# Altium PCB Motor-20.PcbDoc
Units mm, origin at the board's own origin, x right, y up, seen from the top; angles counter-clockwise.
Board outline 40 x 20 mm, 4 copper layers (Top Layer, Layer 1, Layer 2, Bottom Layer), stack 0.603 mm thick; 49 components, 41 nets, 207 pads, 85 vias.
Unrouted connection lines stored in the file: 20.
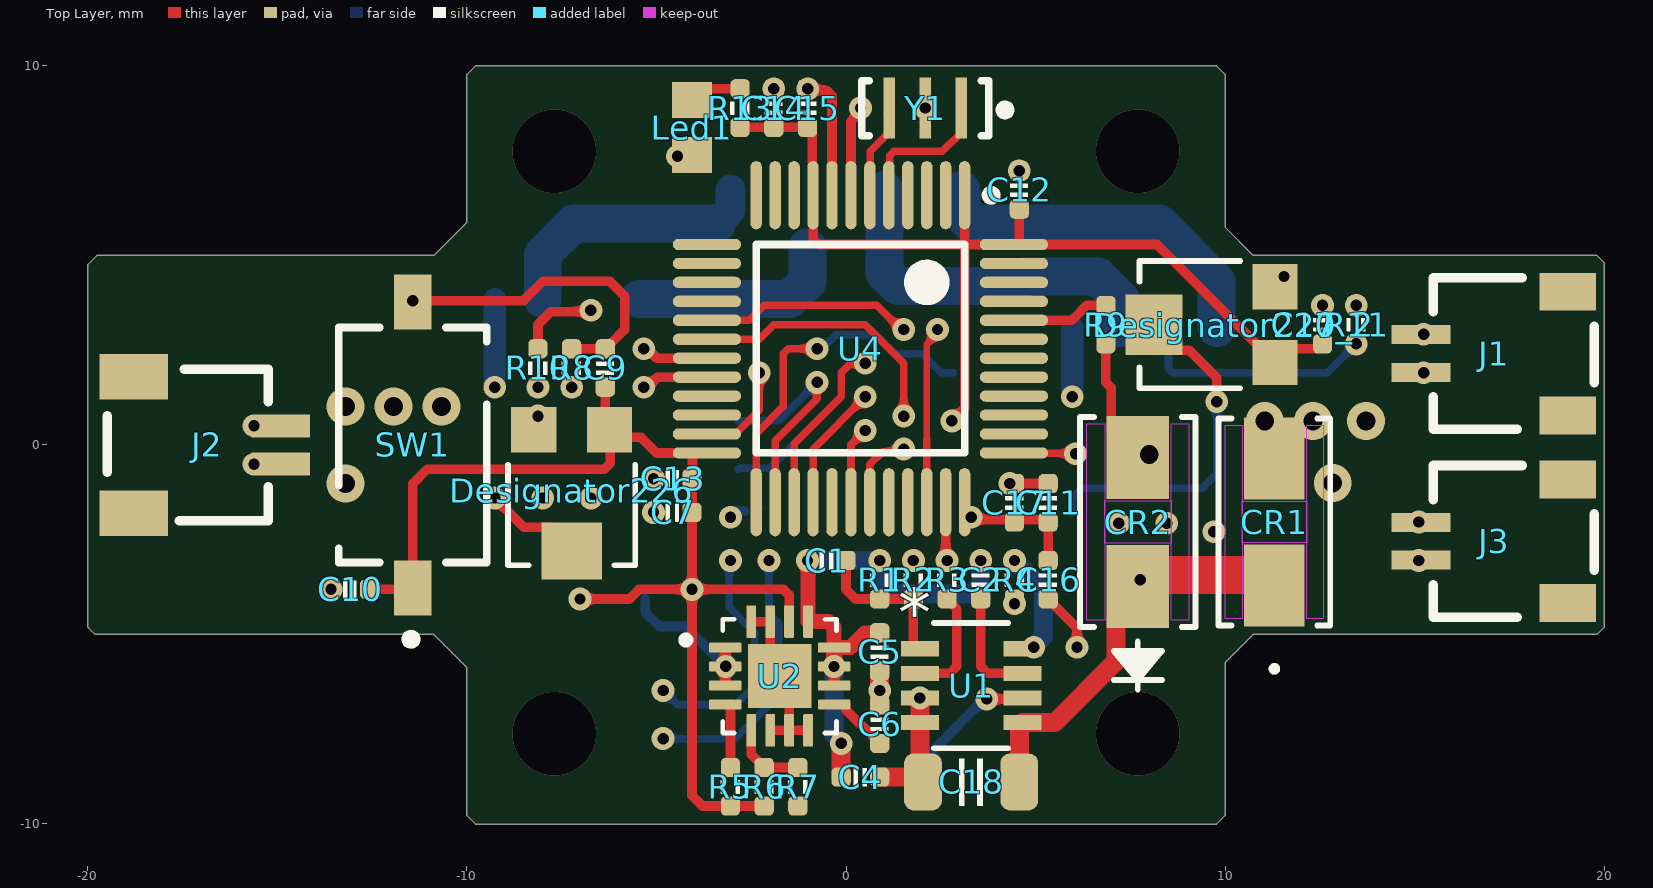
[diagram p0: Top Layer view]
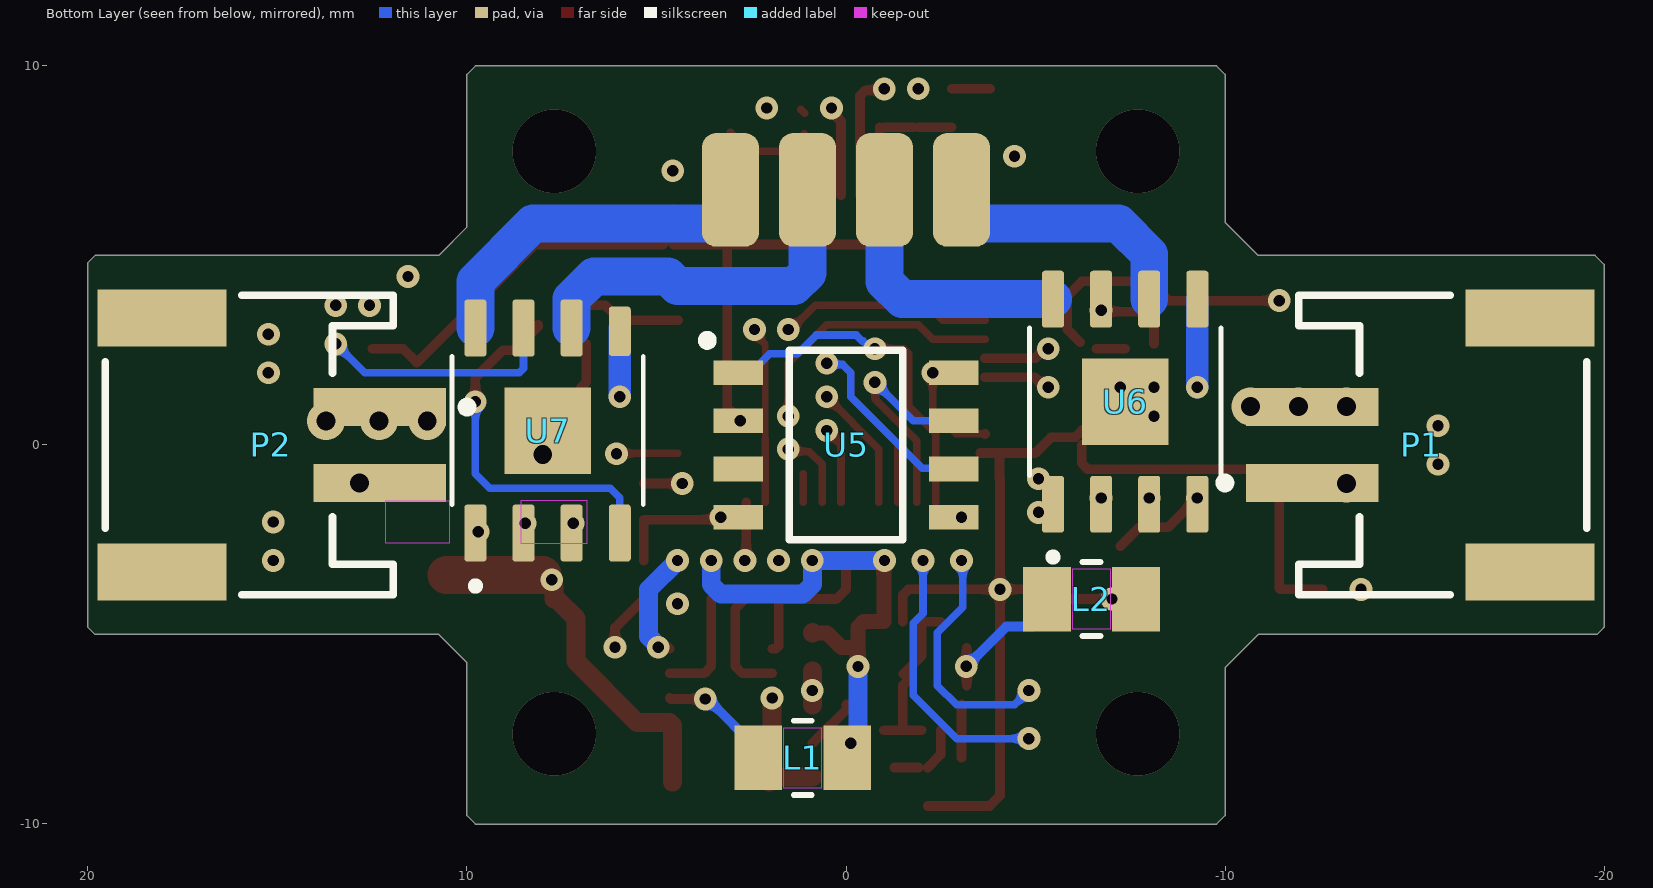
[diagram p1: Bottom Layer view, seen from below]
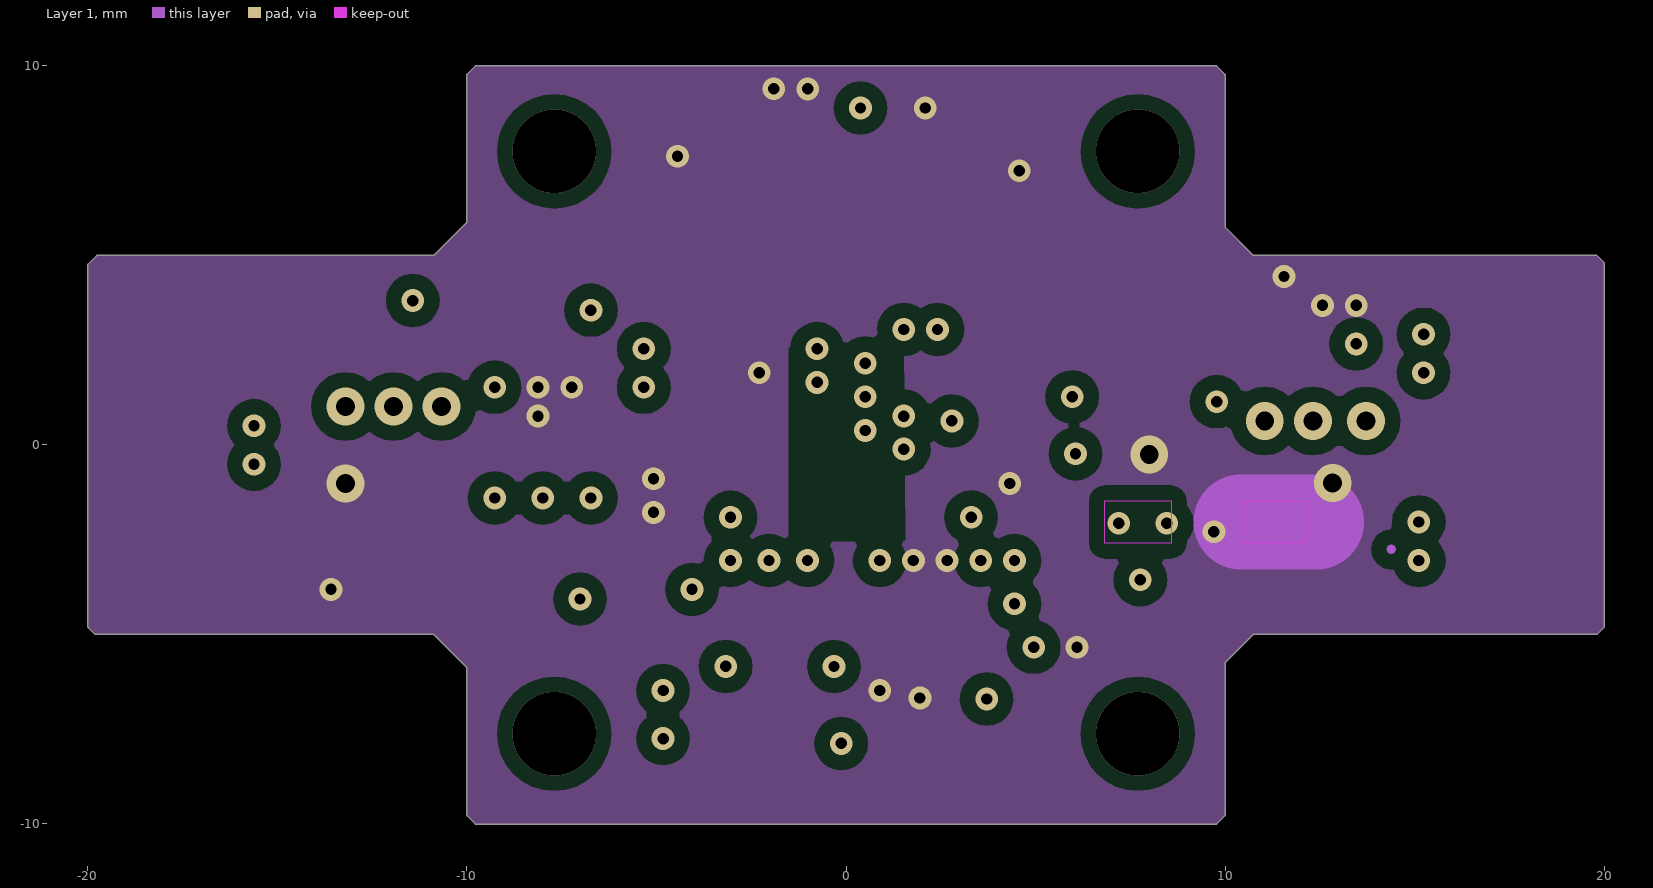
[diagram p2: Layer 1]
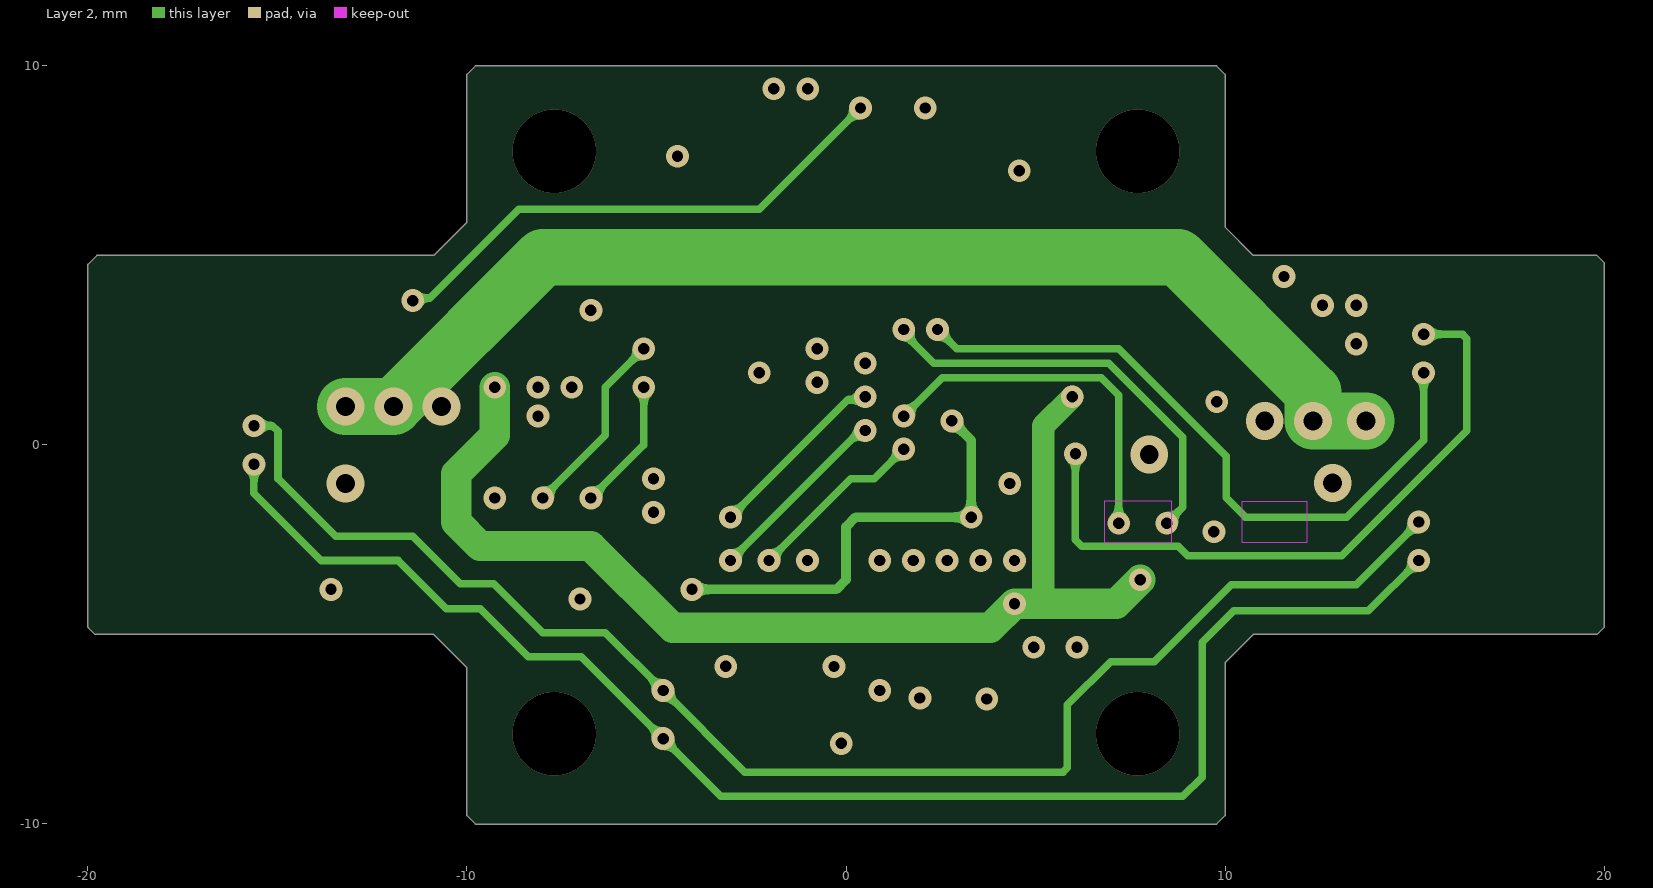
[diagram p3: Layer 2]
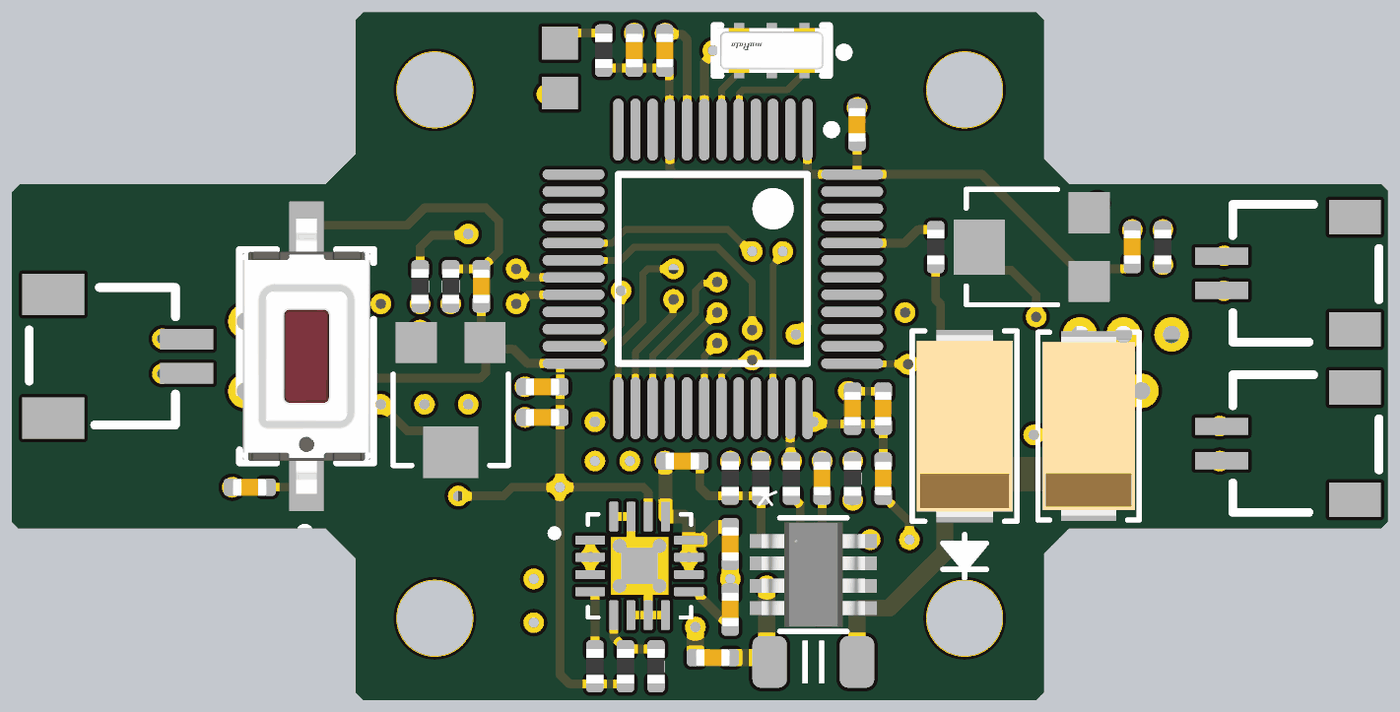
[diagram p4: 3D render of the assembled board from above, using the file's embedded part models]
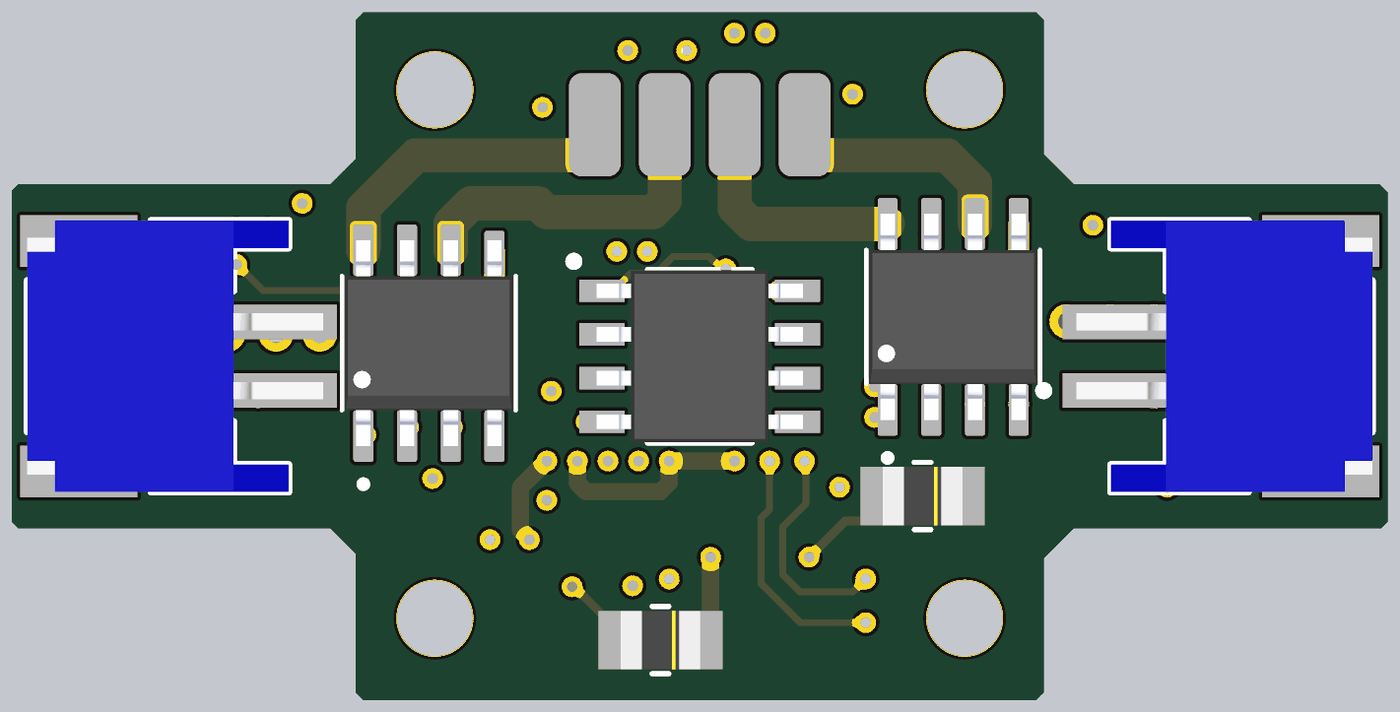
[diagram p5: 3D render of the assembled board from below, using the file's embedded part models]

## Layer stack, top to bottom
Top Solder: solder mask 0.0102, Solder Resist, Dk 3.5
Top Layer: signal copper 0.0356
Dielectric 2: prepreg 0.0711, PP-006, Dk 4.1
Layer 1: signal copper 0.035
Dielectric 1: dielectric 0.32, FR-4, Dk 4.8
Layer 2: signal copper 0.035
Dielectric 3: prepreg 0.0711, PP-006, Dk 4.1
Bottom Layer: signal copper 0.0356
Bottom Solder: solder mask 0.0102, Solder Resist, Dk 3.5

## Board outline
-19.812,-5 -19.986,-4.826 -20,-4.812 -20,4.765 -19.765,5 -10.875,5 -10,5.875 -10,9.779 -9.779,10 9.779,10 10,9.779 10,5.748 10.748,5 19.812,5 20,4.812 20,-4.812 19.812,-5 10.748,-5 10,-5.748 10,-9.779 9.779,-10 -9.779,-10 -10,-9.779 -10,-5.875 -10.875,-5

## Design rules (kind name [scope] priority, off if disabled: settings)
Clearance [All] p1: gap=0 ignorepadtopadclearanceinfootprint=FALSE
PlaneConnect [All] p1: planeconnectstyle=Direct reliefexpansion=0.508 reliefentries=4 reliefconductorwidth=0.254 reliefairgap=0.254
PolygonConnect [All] p1: connectstyle=Direct reliefconductorwidth=0.254 reliefentries=4 polygonreliefangle="90 Angle" airgapwidth=0.254
RoutingVias [All] p1: holewidth=0.711 width=1.27 viastyle="Through Hole" minholewidth=0.1 minwidth=0.1 maxholewidth=5 maxwidth=5
SolderMaskExpansion [All] p1: expansion=0.102 istentingtop=FALSE
Width [All] p1: maxlimit=3 minlimit=0.15 preferedwidth=0.254
29 further rules are at their usual default settings.

## Classes and differential pairs
component class Motor-20: CR1 CR2 J1 J2 J3 L1 L2 P1 P2 SW1 U2 U4 U5 U6 U7 Y1

## Components (designator, comment, footprint, x,y, rotation, side; value= is the part's Value field where it differs from the comment)
C1 "10uF" CAP_0402 -0.508,-3.048 r180 top value=0.1u
C2 "10uF" CAP_0402 3.556,-3.556 r90 top value=0.1u
C4 "10uF" CAP_0402 0.381,-8.763 r180 top value=0.1u
C5 "10uF" CAP_0402 0.889,-5.461 r90 top value=0.1u
C6 "10uF" CAP_0402 0.889,-7.366 r270 top value=0.1u
C7 "10uF" CAP_0402 -4.572,-1.778 r0 top value=0.1u
C9 "10uF" CAP_0402 -6.35,2.032 r90 top value=0.1u
C10 "10uF" CAP_0402 -13.081,-3.81 r0 top value=0.1u
C10_2 "10uF" CAP_0402 12.573,3.175 r270 top value=0.1u
C11 "10uF" CAP_0402 5.334,-1.524 r270 top value=0.1u
C12 "10uF" CAP_0402 4.572,6.731 r270 top value=0.1u
C13 "10uF" CAP_0402 -4.572,-0.889 r0 top value=0.1u
C14 "10uF" CAP_0402 -1.905,8.89 r270 top value=0.1u
C15 "10uF" CAP_0402 -1.016,8.89 r270 top value=0.1u
C16 "10uF" CAP_0402 5.334,-3.556 r90 top value=0.1u
C17 "10uF" CAP_0402 4.445,-1.524 r270 top value=0.1u
C18 "100uF" 1206-CAP 3.302,-8.89 r0 top value=0.1u (schematic designator C10)
CR1 "SS54-HF" SDO_DO-214AC_CIP 11.303,-2.032 r90 top
CR2 "SMAJ30CA" SMASeries_LTF 7.7,-2.032 r90 top
Designator226 "Comment" EVM-3ESX50B14_PAN -7.239,-1.143 r180 top
Designator227 "Comment" EVM-3ESX50B14_PAN 9.779,3.175 r90 top
J1 "" SM02B-SRSS-TB(LF)(SN)#1 17.145,2.413 r90 top
J2 "" SM02B-SRSS-TB(LF)(SN)#2 -16.891,0 r270 top
J3 "" SM02B-SRSS-TB(LF)(SN)#1 17.145,-2.54 r90 top
L1 "2.2uH" IND_EPCOS_B82498F_EPC#1 1.143,-8.255 r0 bottom
L2 "2.2uH" IND_EPCOS_B82498F_EPC#2 -6.477,-4.064 r0 bottom
Led1 "22uF" CAPC1608X90X35ML10T15 -4.064,8.382 r90 top (schematic designator C6)
P1 "" "JST- S2B-PH-SM4-TB(LF)(SN)-2_V" -15.748,0 r90 bottom
P2 "" "JST- S2B-PH-SM4-TB(LF)(SN)-2_V" 15.748,0 r270 bottom
R1 "0R" RES_0402 0.889,-3.556 r270 top value=22R (schematic designator R10)
R2 "0R" RES_0402 1.778,-3.556 r90 top value=22R (schematic designator R10)
R3 "0R" RES_0402 2.667,-3.556 r90 top value=22R (schematic designator R10)
R4 "0R" RES_0402 4.445,-3.556 r270 top value=22R (schematic designator R10)
R5 "0R" RES_0402 -3.048,-9.017 r270 top value=22R (schematic designator R10)
R6 "0R" RES_0402 -2.159,-9.017 r270 top value=22R (schematic designator R10)
R7 "0R" RES_0402 -1.27,-9.017 r270 top value=22R (schematic designator R10)
R8 "0R" RES_0402 -7.239,2.032 r90 top value=22R (schematic designator R10)
R9 "0R" RES_0402 6.858,3.175 r90 top value=22R (schematic designator R10)
R10 "0R" RES_0402 -8.128,2.032 r90 top value=22R
R11 "0R" RES_0402 13.462,3.175 r90 top value=22R (schematic designator R10)
R13 "0R" RES_0402 -2.794,8.89 r90 top value=22R (schematic designator R10)
SW1 "" FP-PTS636_SKG25_SMTR_LFS-MFG -11.43,0 r90 top
U1 "SY8303AIC" TSOT_303AIC_SGY 3.302,-6.35 r0 top
U2 "TLV62130RGTR" QFN50P300X300X100-17N -1.75,-6.096 r0 top
U4 "STM32F101CBT6" LQFP48_N 0.381,2.54 r270 top
U5 "MT6816" SOIC127P600X175-8N-8-V 0,0 r180 bottom
U6 "TB67H450FNG,EL" SOIC127P599X175-9N#1 -7.366,1.143 r90 bottom
U7 "TB67H450FNG,EL" SOIC127P599X175-9N#2 7.874,0.381 r90 bottom
Y1 "" FP-CSTCE_V-MFG 2.093,8.89 r180 top

## Footprints (in the part's own frame and the unit in brackets; to place one, negate y for a bottom-side part, rotate by r counter-clockwise, add the part's x,y. Pads: shape width x height; smd on the part's side, far side on the other; paste and mask are expansions set on the pad)
1206-CAP [mm]
  rrect50% 1x1.5 smd: 1(-1.27,0) 2(1.27,0)
  silkscreen extent -0.3,-0.61 0.3,0.61, body extent -1.5,-0.75 1.5,0.75, height 1.5
CAP_0402 [mil]
  rrect50% 20x20 smd: 1(-20,0) 2(20,0)
  silkscreen extent -7,-9 7,9, body extent -20,-10 20,10, height 20
CAPC1608X90X35ML10T15 [mm] "Chip Capacitor, 2-Leads, Body 1.60x0.80mm, IPC Low Density"
  rect 0.95x1.05 smd: 1(-0.725,0) 2(0.725,0)
  body extent -0.85,-0.45 0.85,0.45, height 0.9
EVM-3ESX50B14_PAN [mil]
  rect 47x47 smd paste+0 mask+0: 1(-39.37,-60.75) 3(39.38,-60.75)
  rect 62.99x59.06 smd paste+0 mask+0: 2(0,65)
  silkscreen extent -66,-25 66,80
FP-CSTCE_V-MFG [mm]
  rect 0.3x1.6 smd paste+0 mask+0: 1(-0.95,0) 2(0,0) 3(0.95,0)
  silkscreen extent -2.23,-0.72 1.68,0.72, body extent -1.78,-0.9 1.78,0.9, height 0.25
FP-PTS636_SKG25_SMTR_LFS-MFG [mm]
  rect 1.45x1 smd paste+0 mask+0: 1(-3.775,0) 2(3.775,0)
  silkscreen extent -5.25,-1.95 3.1,1.95, body extent -4.6,-2.05 4.6,2.05, height 0.25
IND_EPCOS_B82498F_EPC#1 [mil]
  rect 49.5x67 smd paste+0 mask+0: 1(-46.25,0) 2(46.25,0)
  Top Layer keep-out region: -19.5,-31.5 -19.5,31.5 19.5,31.5 19.5,-31.5
  silkscreen extent -9,-38 9,38, body extent -46,-34 46,34, height 55
IND_EPCOS_B82498F_EPC#2 [mil]
  rect 49.49x67 smd paste+0 mask+0: 1(-46.26,0) 2(46.26,0)
  Top Layer keep-out region: -19.5,-31.5 -19.5,31.5 19.5,31.5 19.5,-31.5
  silkscreen extent -9,-38 9,38, body extent -46,-34 46,34, height 55
"JST- S2B-PH-SM4-TB(LF)(SN)-2_V" [mm] "SMD, 2-Leads, Body 7.9x7.6mm, Pitch 2mm"
  rect 1x3.5 smd: 1(-1,3.45) 2(1,3.45)
  rect 1.5x3.4 smd: MP1(-3.35,-2.3) MP2(3.35,-2.3)
  silkscreen extent -3.95,-3.8 3.95,5.88, body extent -3.95,-3.8 3.95,4.8, height 5.6
LQFP48_N [mm] "Thin QFP, 48-Leads, Body 7x7mm, Pitch 0.5mm, IPC Medium Density"
  oval 1.8x0.3 smd: 1(-4.05,2.75) 2(-4.05,2.25) 3(-4.05,1.75) 4(-4.05,1.25) 5(-4.05,0.75) 6(-4.05,0.25) 7(-4.05,-0.25) 8(-4.05,-0.75) 9(-4.05,-1.25) 10(-4.05,-1.75) 11(-4.05,-2.25) 12(-4.05,-2.75) 25(4.05,-2.75) 26(4.05,-2.25) 27(4.05,-1.75) 28(4.05,-1.25) 29(4.05,-0.75) 30(4.05,-0.25) 31(4.05,0.25) 32(4.05,0.75) 33(4.05,1.25) 34(4.05,1.75) 35(4.05,2.25) 36(4.05,2.75)
  oval 0.3x1.8 smd: 13(-2.75,-4.05) 14(-2.25,-4.05) 15(-1.75,-4.05) 16(-1.25,-4.05) 17(-0.75,-4.05) 18(-0.25,-4.05) 19(0.25,-4.05) 20(0.75,-4.05) 21(1.25,-4.05) 22(1.75,-4.05) 23(2.25,-4.05) 24(2.75,-4.05) 37(2.75,4.05) 38(2.25,4.05) 39(1.75,4.05) 40(1.25,4.05) 41(0.75,4.05) 42(0.25,4.05) 43(-0.25,4.05) 44(-0.75,4.05) 45(-1.25,4.05) 46(-1.75,4.05) 47(-2.25,4.05) 48(-2.75,4.05)
  silkscreen extent -4.17,-2.75 2.75,3.58, body extent -3.5,-3.5 3.5,3.5, height 1.6
QFN50P300X300X100-17N [mm]
  rrect25% 0.86x0.26 smd: 1(-1.435,0.75) 2(-1.435,0.25) 3(-1.435,-0.25) 4(-1.435,-0.75) 9(1.435,-0.75) 10(1.435,-0.25) 11(1.435,0.25) 12(1.435,0.75)
  rrect25% 0.26x0.86 smd: 5(-0.75,-1.435) 6(-0.25,-1.435) 7(0.25,-1.435) 8(0.75,-1.435) 13(0.75,1.435) 14(0.25,1.435) 15(-0.25,1.435) 16(-0.75,1.435)
  rect 1.68x1.68 smd paste-2: 17(0,0)
  round 0.4 smd mask+0: 18(0,0) 19(-0.58,0.58) 20(0.58,0.58) 21(-0.58,-0.58) 22(0.58,-0.58)
  silkscreen extent -2.57,-1.5 1.5,1.5
RES_0402 [mil]
  rrect50% 20x20 smd: 1(-20,0) 2(20,0)
  silkscreen extent -7,-10 7,10, body extent -20,-10 20,10, height 14
SDO_DO-214AC_CIP [mil]
  rect 85x63 smd paste+0 mask+0: 1(-66,0) 2(66,0)
  Top Layer keep-out region: -100.5,-51 -100.5,-33.5 100.5,-33.5 100.5,-51
  Top Layer keep-out region: -100.5,33.5 -100.5,51 100.5,51 100.5,33.5
  Top Layer keep-out region: -21.5,-33.5 -21.5,33.5 21.5,33.5 21.5,-33.5
  Keep-Out Layer region: -21.5,-33.5 -21.5,33.5 21.5,33.5 21.5,-33.5
  silkscreen extent -155,-58 108,58, body extent -103,-53 103,53, height 89
SM02B-SRSS-TB(LF)(SN)#1 [mm]
  rect 0.5x1.55 smd: 1(-0.5,1.975) 2(0.5,1.975)
  rect 1x1.5 smd: 3(-1.63,-1.9) 4(1.63,-1.9)
  silkscreen extent -2,-2.6 2,1.65
SM02B-SRSS-TB(LF)(SN)#2 [mm]
  rect 0.6x1.55 smd: 1(-0.5,1.975) 2(0.5,1.975)
  rect 1.2x1.8 smd: 3(-1.8,-1.9) 4(1.8,-1.9)
  silkscreen extent -2,-2.6 2,1.65
SMASeries_LTF [mil]
  rect 86x65 smd paste+0 mask+0: 1(-67,0) 2(67,0)
  Top Layer keep-out region: -102,-53 -102,-34.5 102,-34.5 102,-53
  Top Layer keep-out region: -102,34.5 -102,53 102,53 102,34.5
  Top Layer keep-out region: -22,-34.5 -22,34.5 22,34.5 22,-34.5
  Keep-Out Layer region: -22,-34.5 -22,34.5 22,34.5 22,-34.5
  silkscreen extent -174,-60 109,60, body extent -104,-55 104,55, height 92
SOIC127P599X175-9N#1 [mm]
  rrect25% 1.5x0.58 smd: 1(-2.705,1.905) 2(-2.705,0.635) 3(-2.705,-0.635) 4(-2.705,-1.905) 5(2.705,-1.905) 6(2.705,-0.635) 7(2.705,0.635) 8(2.705,1.905)
  rect 2.285x2.285 smd paste-2: 9(0,0)
  silkscreen extent -4.2,-2.52 1.95,2.52, body extent -3,-2.45 3,2.45, height 1.75
SOIC127P599X175-9N#2 [mm]
  rrect25% 1.5x0.58 smd: 1(-2.705,1.905) 2(-2.705,0.635) 3(-2.705,-0.635) 4(-2.705,-1.905) 6(2.705,-0.635) 7(2.705,0.635) 8(2.705,1.905)
  rrect25% 1.3x0.58 smd: 5(2.619,-1.905)
  rect 2.285x2.285 smd paste-2: 9(0,0)
  silkscreen extent -4.2,-2.52 1.95,2.52, body extent -3,-2.45 3,2.45, height 1.75
SOIC127P600X175-8N-8-V [mm]
  rect 1.31x0.65 smd: 1(-2.845,1.905) 2(-2.845,0.635) 3(-2.845,-0.635) 4(-2.845,-1.905) 5(2.845,-1.905) 6(2.845,-0.635) 7(2.845,0.635) 8(2.845,1.905)
  silkscreen extent -3.79,-2.5 1.5,2.88, body extent -3,-2.5 3,2.5, height 1.75
TSOT_303AIC_SGY [mm]
  rect 1x0.4 smd paste+0 mask+0: 1(-1.353,0.975) 2(-1.353,0.325) 3(-1.353,-0.325) 4(-1.353,-0.975) 5(1.353,-0.975) 6(1.353,-0.325) 7(1.353,0.325) 8(1.353,0.975)
  silkscreen extent -0.98,-1.65 0.98,1.65, body extent -1.5,-1.52 1.5,1.52, height 1.09

## Part data
C1 C2 C4 C5 C6 C7 C9 C10 C10_2 C11 C12 C13 C14 C15 C16 C17: library part µçÈÝ-0402, "Capacitor"
C18: library part µçÈÝ-1206, "Capacitor"
CR1: "No Description Available", Mfr_Name=Comchip, Type="Diodes - Rectifiers, Single"
CR2: "No Description Available", Mfr_Name="Littelfuse Inc"
J1 J2 J3: library part SM02B-SRSS-TB(LF)(SN), "Connector Header Surface Mount, Right Angle 2 position 0.039 _1.00mm_", Package=None, Availability=Unavailable, MF="JST Sales", MP=SM02B-SRSS-TB_LF__SN_, Price=None, SnapEDA_Link=https://www.snapeda.com/parts/SM02B-SRSS-TB%28LF%29%28SN%29/JST%20Sales%20America%20Inc./view-part/447499/?ref=snap
L1 L2: library part B82498F3100+000, "No Description Available", Mfr_Name=TDK
Led1: library part CMP-2006-02924-1, Manufacturer=Murata, PART NUMBER=GRM188R71H472KA01D
P1 P2: library part CMP-1755-00001-1, "Male Header, Pitch 2 mm, 1 x 2 Position, Height 5.5 mm, -25 to 85 degC, RoHS, Tape and Reel", Colour=Black, Current Rating="3 A", Max Operating Temperature=105degC, Min Operating Temperature=-65degC, Package Quantity=100, ComponentLink1Description="Manufacturer URL", ComponentLink1URL=http://www.jst.com/home2.html, ComponentLink2Description=Datasheet, ComponentLink2URL=http://www.jst-mfg.com/product/pdf/eng/ePH.pdf, Contact Finish=Lead, Contact Material=Bronze, Contact Plating=Tin, DatasheetVersion=Dec-12, Height="8.13 mm", Lead Pitch="0.1 inch", Length="101.19 mm", Mount="Through Hole", PackageDescription="Male Header, Pitch 2 mm, 1 x 2 Position, Height 5.5 mm", PackageReference=S2B-PH-SM4-TB(LF)(SN)-2, Packaging=Bulk, Pins=40, Radiation Hardening=No, RoHSCompliant=True, Width="2.34 mm"
R1 R2 R3 R4 R5 R6 R7 R8 R9 R10 R11 R13: library part CMP-2000-00054-1
SW1: library part CMP-10040-000025-1, "TACT 6.0 X 3.5, 2.5 MM H, 250GF,"
U1: "No Description Available", Mfr_Name=Silergy, RefDes=RefDes, Type=Type
U2: "3-17V 3A Step-Down Converter in 3x3 QFN Package 16-VQFN -40 to 85", Package="VQFN-16 Texas Instruments", Availability=Unavailable, DigiKey-Purchase-URL=https://snapeda.com/shop?store=DigiKey&id=423292, MF="Texas Instruments", Mouser-Purchase-URL=https://snapeda.com/shop?store=Mouser&id=423292, MP=TLV62130RGTR, Price=None, SnapEDA_Link=https://www.snapeda.com/parts/TLV62130RGTR/Texas%20Instruments/view-part/423292/?ref=snap, Texas_Instruments-Purchase-URL=https://snapeda.com/shop?store=Texas+Instruments&id=423292
U4: "STM32 ARM-based 32-bit MCU with 128 Kbytes Flash, 48-pin LQFP, Industrial Temperature", ComponentLink1Description="Manufacturer Link", ComponentLink1URL=www.st.com/stm32, ComponentLink2Description=Datasheet, ComponentLink2URL=http://www.st.com/stonline/products/literature/ds/13586.pdf, DatasheetVersion="rev6, Mar-2008", PackageDescription="48-Pin Low-Profile Quad Flat Pack, 7 x 7 mm Body, 0.5 mm Pitch (LQFP48)", PackageReference=LQFP48, PackageVersion=Mar-2008, Published=30-May-2008, Publisher="Altium Limited"
U5: library part TLE5012B_E1000, "TLE5012B/TLI5012B Angular and Linear Position Sensor Evaluation Board Automotive", Package="SOIC-8 Infineon Technologies", Availability="In Stock", Check_prices=https://www.snapeda.com/parts/TLE5012B%20E1000/Infineon+Technologies/view-part/?ref=eda, MF="Infineon Technologies", MP="TLE5012B E1000", Price=None, SnapEDA_Link=https://www.snapeda.com/parts/TLE5012B%20E1000/Infineon+Technologies/view-part/?ref=snap
U6 U7: "- Motor Driver - - 8-HSOP", Package="SOIC-8 Toshiba Semiconductor and Storage", Availability="In Stock", Check_prices=https://www.snapeda.com/parts/TB67H450FNG,EL/Toshiba+Semiconductor+and+Storage/view-part/?ref=eda, MF="Toshiba Semiconductor and Storage", MP=TB67H450FNG,EL, Price=None, Purchase-URL=https://pricing.snapeda.com/search?q=TB67H450FNG,EL&ref=eda, SnapEDA_Link=https://www.snapeda.com/parts/TB67H450FNG,EL/Toshiba+Semiconductor+and+Storage/view-part/?ref=snap
Y1: library part CMP-06057-000013-1, "CERAMIC RES 20.0000MHZ 15PF SMD", Capacitance=15pF, Case/Package=SMD/SMT, Frequency=20MHz, Frequency Stability=0.3%, Frequency Tolerance=0.5%, Max Operating Temperature=80°C, Min Operating Temperature=-20°C, Package Quantity=3000, Resistor Type=Ceramic, Contact Plating=Gold, Height=0.039inch, Impedance=40R, Lead Free="Lead Free", Length=0.126inch, Load Capacitance=15pF, Mount="Surface Mount", Number of Pins=3, Packaging="Tape and Reel", REACH SVHC="No SVHC", Self Resonant Frequency=20MHz, Termination=SMD/SMT, Tolerance=0.5%, Width=0.051inch

## Free pads (board coordinates)
  rrect50% 1.5x3 smd far side: 5(-3.048,6.731) 5(-1.016,6.731) 5(1.016,6.731) 5(3.048,6.731)

## Via types
v1: diameter 0.6, hole 0.3, Top Layer to Bottom Layer, 72 vias
v2: diameter 1, hole 0.5, Top Layer to Bottom Layer, 9 vias
v3: diameter 2.2, hole 2.2, Top Layer to Bottom Layer, 4 vias

## Nets (pads, with @x,y where several pads share a name; then routed paths per layer and width w, separated by ;. In a path a pad name is that pad's centre, name@x,y a point inside that pad or via, vN(x,y) a via of type N, cw(c..) or ccw(c..) an arc to the next point about the centre after c; other vN are vias at no path point)
BOOT0: R9.2 U4.44 | length 2.6
  Top Layer w0.254: U4.44 5.957,3.29 6.35,3.683 R9.2
CANH:  | length 0
CANL: 
CSN: U4.25 U5.1 | length 9.3
  Top Layer w0.2: U4.25 -2.369,0.298 -1.651,1.016 -1.651,2.413 -1.524,2.54 v1(-0.762,2.54)
  Bottom Layer w0.2: v1(-0.762,2.54) -0.654,2.54 -0.45,2.744 -0.431,2.744 -0.273,2.902 0.781,2.902 1.27,2.413 2.007,2.413 2.515,1.905 U5.1
GND: C4.1 C5.1 C6.1 C7.1 C10.1 C10_2.1 C11.1 C12.1 C13.1 C14.1 C15.1 C16.1 C17.1 C18.1 CR2.2 Designator226.3 Designator227.3 Led1.1 P1.1 P1.MP1 P1.MP2 P2.2 P2.MP1 P2.MP2 R2.2 R3.2 R7.2 R8.1 R9.1 R10.1 R11.2 U1.3 U1.4 U2.6 U2.7 U2.8 U2.15 U2.16 U2.17 U2.18 U2.19 U2.20 U2.21 U2.22 U4.8 U4.23 U4.35 U4.47 U5.8 U6.1 U6.9 U7.1 U7.9 Y1.2 | length 24.6
  Top Layer w0.2: U4.23@-3.66,0.299 -2.91,0.299 -2.286,0.923 v1(-2.286,1.905)
  Top Layer w0.254: U4.23 U4.23@-3.66,0.299 ; U2.16 U2.15 -2,-5.559 U2.17@-1.516,-6.043 ; U2.6 U2.7 ; U2.17 -1.5,-6.346 U2.7 ; U2.8 U2.7 ; C15.1@-0.882,9.395 -0.849,9.362 -0.518,9.362 -0.369,9.214 U4.8 ; C18.1@1.905,-8.763 C18.1 ; U4.35 2.631,-3.012 v1(2.667,-3.048) ; v1(4.318,-1.016) C11.1 ; C16.1 6.096,-4.826 v1(6.096,-5.334) ; R9.1 6.858,1.651 7.001,1.508 7.001,0.368 CR2.2 7.776,-0.254 v2(8.001,-0.254)
  Top Layer w0.5: C4.1 C18.1@1.905,-8.763 ; C6.1 v1(0.889,-6.477) C5.1 ; U1.4 1.949,-8.807 C18.1 ; U1.4@1.949,-7.315 v1(1.949,-6.675)
  Layer 1 w2.5: 10.414,-2.032 12.414,-2.032
  other v1: -13.589,-3.81 1.778,-3.048 9.708,-2.286 -5.08,-1.778 -5.08,-0.889 -8.128,0.762 -8.128,1.524 -7.239,1.524 12.573,3.683 13.462,3.683 11.557,4.445 4.572,7.239 -4.445,7.62 2.093,8.89 -1.905,9.398 -1.009,9.395
  other v2: -13.208,-1.016 12.842,-1.007
HVPP: 
IN1-U6: U4.19 U6.3 | length 6.8
  Top Layer w0.254: v1(-5.334,2.54) -5.24,2.54 -4.99,2.29 U4.19
  Layer 2 w0.2: v1(-8.001,-1.397) -6.35,0.254 -6.35,1.524 v1(-5.334,2.54)
IN1-U7: U4.18 U7.3 | length 16.8
  Top Layer w0.2: U4.18 -2.29,2.79 -1.905,3.175 0.508,3.175 1.524,2.159 v1(1.524,0.762)
  Layer 2 w0.2: v1(1.524,0.762) 2.54,1.778 6.731,1.778 7.193,1.316 v1(7.193,-2.064)
IN2-U6: U4.20 U6.2 | length 5.3
  Top Layer w0.254: v1(-5.334,1.524) -5.24,1.524 -4.974,1.79 U4.20
  Layer 2 w0.2: v1(-6.731,-1.397) -5.334,0 v1(-5.334,1.524)
IN2-U7: U4.17 U7.2 | length 16.7
  Top Layer w0.2: U4.17 -2.552,3.29 -2.159,3.683 0.814,3.683 1.449,3.048 v1(1.524,3.048)
  Layer 2 w0.2: v1@1.524,2.954 2.319,2.159 6.938,2.159 8.89,0.207 8.89,-1.637 v1(8.463,-2.064)
  Layer 2 w0.254: v1@1.524,2.954 v1(1.524,3.048)
MISO: U4.27 U5.6 | length 9.6
  Top Layer w0.2: U4.27 -1.369,0.028 -0.127,1.27 -0.127,1.905 0.093,2.125 0.474,2.125 v1(0.508,2.159)
  Bottom Layer w0.2: U5.6 -2.82,-0.61 -2.007,-0.61 -0.127,1.27 -0.127,1.905 0.093,2.125 0.474,2.125 v1(0.508,2.159)
MOSI: U4.28 U5.5 | length 8.7
  Top Layer w0.2: U4.28 -0.869,-0.107 v1(0.508,1.27)
  Layer 2 w0.2: v1(-3.048,-1.905) 0.05,1.193 0.431,1.193 v1(0.508,1.27)
  Bottom Layer w0.2: U5.5@-2.353,-1.743 U5.5@-2.29,-1.68
  Bottom Layer w0.254: v1(-3.048,-1.905) -2.886,-1.743 U5.5@-2.683,-1.743
NetC1_1: C1.1 R1.2 R2.1 U1.1 | length 4.1
  Top Layer w0.254: C1.1 0,-3.81 0.254,-4.064 R1.2 R2.1 1.778,-5.302 1.851,-5.375 U1.1
NetC2_1: C2.1 U1.7 | length 3
  Top Layer w0.254: C2.1 3.556,-5.842 3.739,-6.025 U1.7
NetC6_2: C6.2 U2.9 | length 1.7
  Top Layer w0.254: U2.9 -0.015,-6.846 -0.012,-6.849 -0.012,-6.973 0.762,-7.747 C6.2
NetL1_2: L1.2 U1.6 | length 3.9
  Top Layer w0.254: v1(3.711,-6.703) 4.627,-6.703 U1.6
  Bottom Layer w0.254: L1.2@1.816,-7.753 L1.2 2.318,-8.033 3.648,-6.703 v1(3.711,-6.703) v1@3.711,-6.766
NetL2_2: L2.2 U2.1 U2.2 U2.3 | length 4.1
  Top Layer w0.254: U2.3 U2.2 -3.179,-5.846 v1(-3.175,-5.842) ; U2.1 -3.185,-5.843 v1(-3.175,-5.842)
  Bottom Layer w0.254: L2.2@-5.298,-4.064 -5.298,-4.415 -4.925,-4.788 -4.229,-4.788 v1(-3.175,-5.842)
NetR3_2: R3.1 U1.2 | length 2.9
  Top Layer w0.254: U1.2 2.738,-6.025 2.921,-5.842 2.921,-4.318 R3.1
NetR4_1: R4.1 U1.8 | length 3.1
  Top Layer w0.254: v1(4.445,-3.048) R4.1@4.476,-3.079 ; U1.8 4.696,-5.334 v1(4.953,-5.334)
  Bottom Layer w0.5: v1(4.445,-3.048) 5.207,-3.81 5.207,-5.053 4.953,-5.307 v1(4.953,-5.334)
NetR5_2: R5.1 U2.4 | length 1.4
  Top Layer w0.254: -3.048,-8.255 U2.4@-3.048,-6.846
NetR6_2: R6.1 R7.1 U2.5 | length 1.8
  Top Layer w0.254: U2.5 -2.497,-7.534 -2.497,-8.171 R6.1 ; R6.1@-1.921,-8.509 R7.1
NRST: C9.2 R8.2 SW1.2 U4.7 | length 24.4
  Top Layer w0.254: SW1.2 v1(-11.43,3.81) -8.509,3.81 -8.001,4.318 -6.223,4.318 -5.842,3.937 -5.842,3.048 C9.2@-6.181,2.709 ; R8.2@-7.366,2.54 C9.2@-6.604,2.54 ; U4.7 0.131,8.546 0.381,8.796 v1(0.381,8.89)
  Layer 1 w0.254: v1(-11.43,3.81) v1@-11.364,3.876
  Layer 2 w0.2: v1@-11.364,3.876 -10.983,3.876 -8.636,6.223 -2.286,6.223 v1(0.381,8.89)
OSC_IN: U4.5 Y1.1 | length 3.4
  Top Layer w0.2: U4.5@1.143,6.392 1.15,6.399 1.15,7.63 1.267,7.747 2.54,7.747 2.983,8.19 2.993,8.19 3.048,8.245 Y1.1@3.048,8.255
OSC_OUT: U4.6 Y1.3 | length 1.9
  Top Layer w0.2: U4.6@0.635,6.621 0.635,7.747 1.078,8.19 1.093,8.19 1.103,8.2 Y1.3@1.103,8.215 ; Y1.3@1.093,8.753 Y1.3@1.193,8.853
OUT: U5.3
OUT1-U6: pad.5@-3.048,6.731 U6.6 | length 7.2
  Bottom Layer w0.8: pad.5@-3.398,5.842 -3.048,6.192 pad.5@-3.048,6.731
  Bottom Layer w1: U6.6 -8.001,5.033 -7.192,5.842 pad.5@-3.398,5.842
OUT1-U7: pad.5@1.016,6.731 U7.6 | length 9.7
  Bottom Layer w1: pad.5@1.016,6.731 1.016,4.542 1.367,4.191 4.445,4.191 4.699,4.445 6.653,4.445 7.239,3.859 U7.6
OUT2-U6: pad.5@-1.016,6.731 U6.8 | length 5.5
  Bottom Layer w1: U6.8 -1.485,3.848 -1.016,4.317 -1.016,5.207
OUT2-U7: pad.5@3.048,6.731 U7.8 | length 9.3
  Bottom Layer w1: pad.5@3.048,6.731 3.048,6.092 3.298,5.842 8.255,5.842 9.779,4.318 U7.8
RXD: J2.2 J3.1 U4.31 U4.32 U4.45 | length 54.2
  Top Layer w0.2: U4.31 0.631,-0.512 0.97,-0.173 v1@1.459,-0.173 ; U4.32 U4.32@1.131,-0.76
  Top Layer w0.254: v1@1.459,-0.173 v1(1.524,-0.108)
  Layer 2 w0.2: v1(-15.621,-0.508) -15.621,-1.27 -13.843,-3.048 -11.811,-3.048 -10.541,-4.318 -9.652,-4.318 -8.382,-5.588 -6.985,-5.588 v1(-4.826,-7.747) -3.302,-9.271 8.89,-9.271 9.398,-8.763 9.398,-5.207 10.226,-4.379 13.782,-4.379 v1(15.113,-3.048) ; v1(-2.032,-3.048) 0.127,-0.889 0.743,-0.889 v1(1.524,-0.108)
  Bottom Layer w0.2: v1(-4.826,-7.747) -2.921,-7.747 -1.778,-6.604 -1.778,-4.699 -2.032,-4.445 v1(-2.032,-3.048)
S: 
SCK: U4.26 U5.7 | length 6.1
  Top Layer w0.2: U4.26 -1.869,0.115 -0.772,1.212 -0.772,1.641 v1(-0.762,1.651)
  Bottom Layer w0.2: U5.7 -1.778,0.635 v1(-0.762,1.651)
SWCLK: J1.2 U4.37 | length 19.4
  Top Layer w0.18: U4.37 U4.37@4.442,-0.221 ; v1@6.043,-0.221 v1(6.054,-0.232)
  Top Layer w0.2: U4.37@4.442,-0.221 v1@6.043,-0.221
  Layer 2 w0.2: v1(6.054,-0.232) 6.054,-2.498 6.223,-2.667 8.763,-2.667 9.017,-2.921 13.081,-2.921 16.383,0.381 16.383,2.804 16.266,2.921 v1(15.24,2.921)
SWDIO: J1.1 U4.34 | length 22.8
  Top Layer w0.18: 2.131,0.155 2.131,2.652 2.413,2.934 v1(2.413,3.048)
  Top Layer w0.2: U4.34 2.131,0.155
  Layer 2 w0.2: v1(2.413,3.048) 2.921,2.54 7.192,2.54 10.033,-0.301 10.033,-1.397 10.541,-1.905 13.208,-1.905 15.24,0.127 v1(15.24,1.905)
TXD: J2.1 J3.2 U4.30 U4.33 U4.46 | length 52.4
  Top Layer w0.2: U4.30 0.131,0.004 v1(0.508,0.381)
  Layer 2 w0.2: v1(-15.621,0.508) -15.135,0.508 -14.986,0.359 -14.986,-0.889 -13.462,-2.413 -11.43,-2.413 -10.182,-3.661 -9.293,-3.661 -8.001,-4.953 -6.35,-4.953 v1(-4.826,-6.477) -2.667,-8.636 5.725,-8.636 5.842,-8.519 5.842,-6.858 6.985,-5.715 8.128,-5.715 10.16,-3.683 13.462,-3.683 v1(15.113,-2.032) ; v1(-3.048,-3.048) 0.304,0.304 0.431,0.304 v1(0.508,0.381)
  Bottom Layer w0.2: v1(-4.826,-6.477) -4.445,-6.858 -2.921,-6.858 -2.413,-6.35 -2.413,-4.953 -3.086,-4.28 -3.086,-3.086 v1(-3.048,-3.048)
VCC_3V3: C7.2 C9.1 C10.2 C10_2.2 C11.2 C12.2 C13.2 C14.2 C15.2 C16.2 C17.2 Designator226.1 Designator227.1 L2.1 R5.2 R6.2 R13.1 SW1.1 U2.14 U4.1 U4.9 U4.24 U4.36 U4.48 U5.2 U5.4 | length 72.3
  Top Layer w0.254: C10.2 -11.465,-3.81 SW1.1 -11.43,-1.016 -11.049,-0.635 -6.372,-0.635 -6.223,-0.486 Designator226.1@-6.223,0 ; v1(-7.018,-4.064) -5.715,-4.064 -5.461,-3.81 v1(-4.064,-3.81) ; Designator226.1@-6.35,0.638 C9.1 C9.1@-6.35,1.651 ; Designator226.1 -6.042,0.203 -5.41,0.203 -4.997,-0.21 U4.24 U4.24@-3.542,-0.21 ; U4.24@-4.051,-0.224 -4.051,-0.876 C13.2 C7.2 v1(-4.064,-3.81) ; R13.1 C14.2 ; R6.2 R5.2 -3.788,-9.525 -4.064,-9.249 v1(-4.064,-3.81) ; C14.2@-1.778,8.382 C15.2 ; U2.14 -1.5,-3.959 -1.649,-3.81 v1(-4.064,-3.81) ; C15.2@-0.889,8.382 -0.889,7.372 -0.869,7.352 U4.9 -0.869,5.439 -0.72,5.29 3.131,5.29 ; v1(2.794,0.635) 3.131,0.972 3.131,5.29 ; U4.1 3.131,5.29 ; v1(3.302,-1.905) 3.365,-1.968 C11.2@5.334,-1.968 ; C12.2 4.572,5.311 4.551,5.29 U4.48 3.131,5.29 ; U4.48@4.826,5.29 8.207,5.29 Designator227.1 11.687,2.54 C10_2.2@12.499,2.54 ; C16.2 C11.2
  Layer 2 w0.254: v1(-4.064,-3.81) -0.254,-3.81 0,-3.556 0,-2.159 0.254,-1.905 v1(3.302,-1.905) 3.302,0.127 v1(2.794,0.635)
VCC_5V: C1.2 C2.2 C4.2 C5.2 L1.1 R1.1 U2.10 U2.11 U2.12 U2.13 | length 14.5
  Top Layer w0.254: U2.10 v1(-0.315,-5.846)
  Top Layer w0.4: C1.2@-1,-3.064 U2.13 -0.464,-4.661 -0.315,-4.81 U2.12 ; v1(-0.315,-5.846) U2.12 ; C5.2@0.885,-4.957 0.504,-4.957 0.115,-5.346 U2.12
  Top Layer w0.5: C4.2 v1(-0.127,-7.874) ; C5.2@0.885,-4.957 C5.2
  Bottom Layer w0.254: L1.1@-0.315,-7.559 -0.442,-7.686 -0.254,-7.874 v1(-0.127,-7.874)
  Bottom Layer w0.5: v1(-1.016,-3.048) v1(0.889,-3.048) 0.889,-3.683 1.143,-3.937 3.302,-3.937 3.556,-3.683 v1(3.556,-3.048) ; L1.1@-0.315,-7.559 v1(-0.315,-5.846)
VCC_24V: C18.2 CR1.1 CR2.1 R4.2 U1.5 U6.5 U7.5 | length 42.9
  Top Layer w0.254: U1.5@4.572,-7.398 4.645,-7.325 U1.5
  Top Layer w0.5: C18.2 U1.5@4.572,-7.398 ; U1.5 5.502,-7.325 7.124,-5.703 7.124,-4.576 7.636,-4.064 7.7,-4.064 CR2.1
  Top Layer w1: CR2.1@8.001,-3.429 CR1.1@10.541,-3.429
  Layer 2 w0.6: 5.207,-3.937 5.207,0.508 v1(5.969,1.27)
  Layer 2 w0.8: v1(-9.271,1.524) -9.271,0.254 -10.287,-0.762 -10.287,-2.032 -9.652,-2.667 -6.731,-2.667 -4.572,-4.826 3.81,-4.826 v1(4.445,-4.191) 7.131,-4.191 v1(7.766,-3.556)
  Bottom Layer w0.6: v1(-9.271,1.524) U6.5 ; v1(5.969,1.27) U7.5@5.969,3.086
VCC_IN: CR1.2 P1.2 P2.1 | length 30.8
  Layer 2 w1.5: v2(-13.208,1.016) v2(-11.938,1.016) -8.001,4.953 8.763,4.953 12.319,1.397 v2(12.319,0.635) v2(13.716,0.635)
  other v2: 11.049,0.635 -10.668,1.016
VREF-U6: Designator226.2 U6.4 | length 2.6
  Top Layer w0.254: v1(-9.271,-1.397) -8.497,-2.171 -7.735,-2.171 Designator226.2@-7.239,-2.667
VREF-U7: Designator227.2 U7.4 | length 9.3
  Top Layer w0.254: Designator227.2 8.128,3.125 8.751,2.502 9.055,2.502 9.779,1.778 v1(9.779,1.143)
  Bottom Layer w0.2: U7.4@5.969,-1.778 5.969,-1.397 6.223,-1.143 9.398,-1.143 9.779,-0.762 v1(9.779,1.143)
pads on no net: J1.3 J1.4 J2.3 J2.4 J3.3 J3.4 Led1.2 R10.2 R11.1 R13.2 U4.2 U4.3 U4.4 U4.10 U4.11 U4.12 U4.13 U4.14 U4.15 U4.16 U4.21 U4.22 U4.29 U4.38 U4.39 U4.40 U4.41 U4.42 U4.43 U6.7 U7.7
copper on no net: | length 9.5
  Top Layer w0.254: -8.128,2.667 -8.128,3.175 -7.784,3.519 -6.768,3.519 v1(-6.731,3.556) ; -3.81,9.398 -2.794,9.398
  Bottom Layer w0.2: 8.509,3.086 8.509,2.022 8.626,1.905 12.7,1.905 v1(13.462,2.667)
  other v3: -7.7,-7.62 7.7,-7.62 -7.7,7.747 7.7,7.747

## Polygon pours and split planes (outlines as drawn)
GND on Layer 1 "GND_L02_P000" (solid, pour order 0): -19.812,-5 -19.986,-4.826 -20,-4.812 -20,4.765 -19.765,5 -10.875,5 -10,5.875 -10,9.779 -9.779,10 9.779,10 10,9.779 10,5.748 10.748,5 19.812,5 20,4.812 20,-4.812 19.812,-5 10.748,-5 10,-5.748 10,-9.779 9.779,-10 -9.779,-10 -10,-9.779 -10,-5.875 -10.875,-5

## Other copper
Layer 1:
  pour cut-out: -1.504,2.566 1.524,2.566 1.568,-2.512 -1.504,-2.567

## Text inside footprints (layer, text, board x,y; h text height)
U1: Top Overlay "*" at 1.378,-5.045 h1.27; Top 3D Body "*" at 2.515,-6.172 h1.27